# Altium PCB dsPIC Click v1.4.PcbDoc
Units mm, origin at the board's own origin, x right, y up, seen from the top; angles counter-clockwise.
Board outline 38 x 63.5 mm, 2 copper layers (Top Layer, Bottom Layer); 74 components, 48 nets, 199 pads, 45 vias.
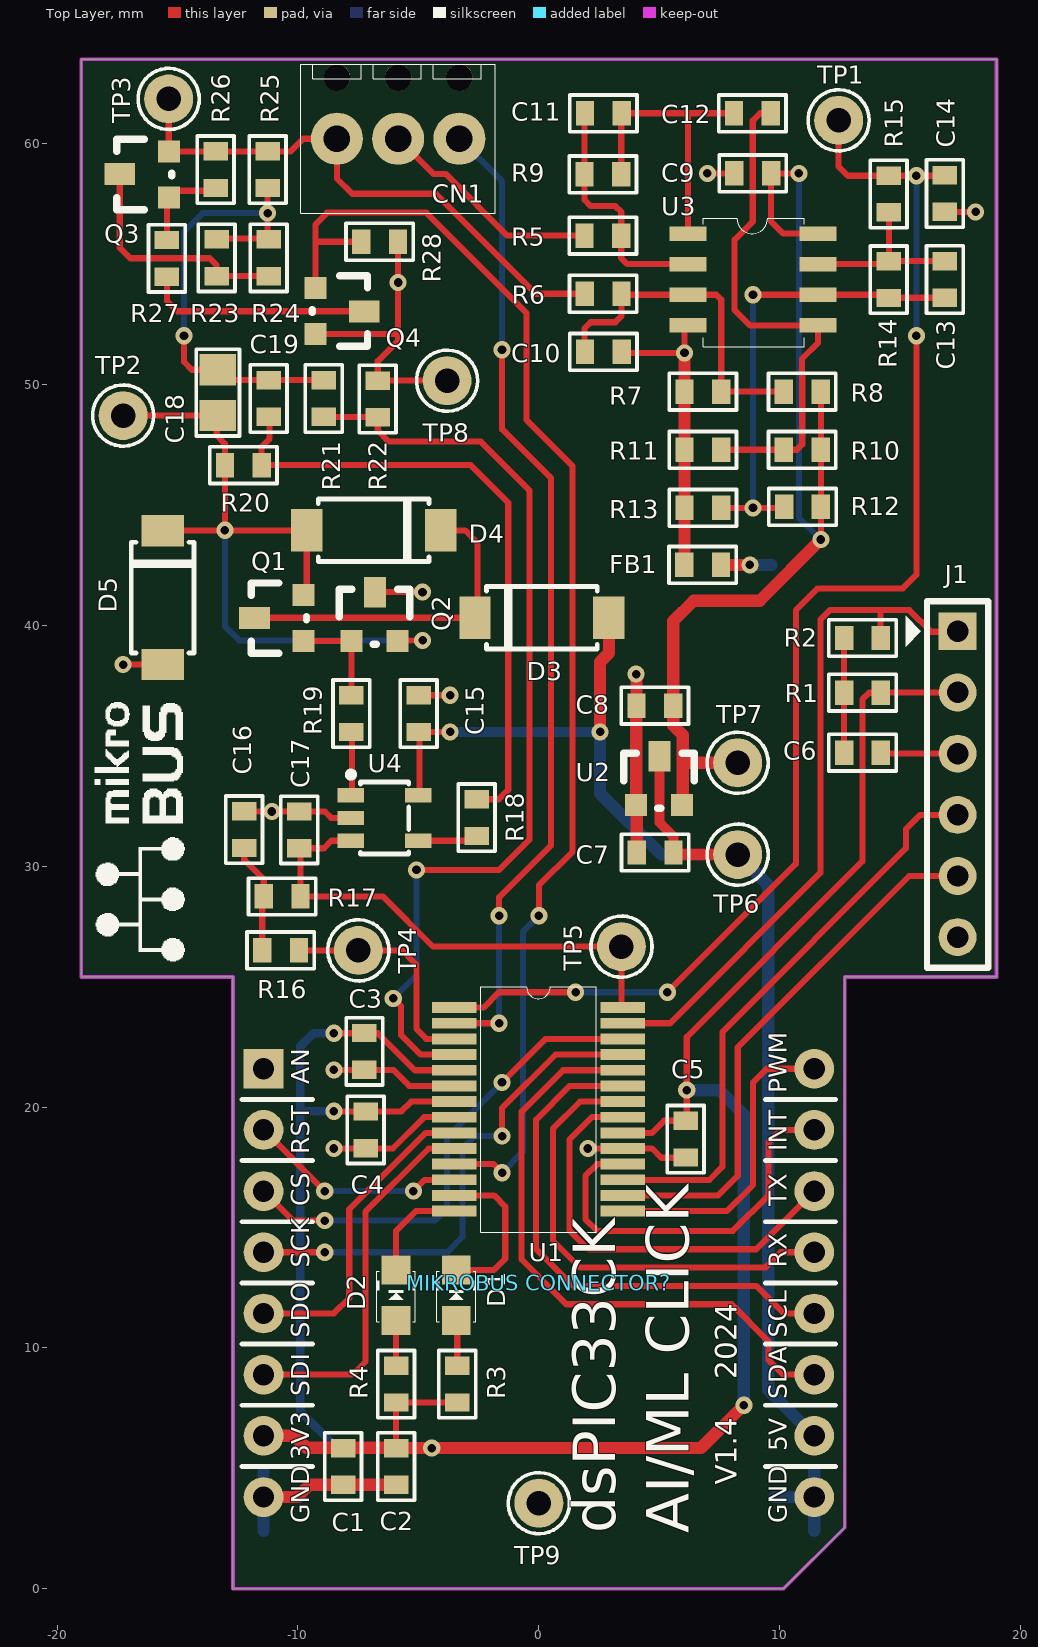
[diagram p0: Top Layer view]
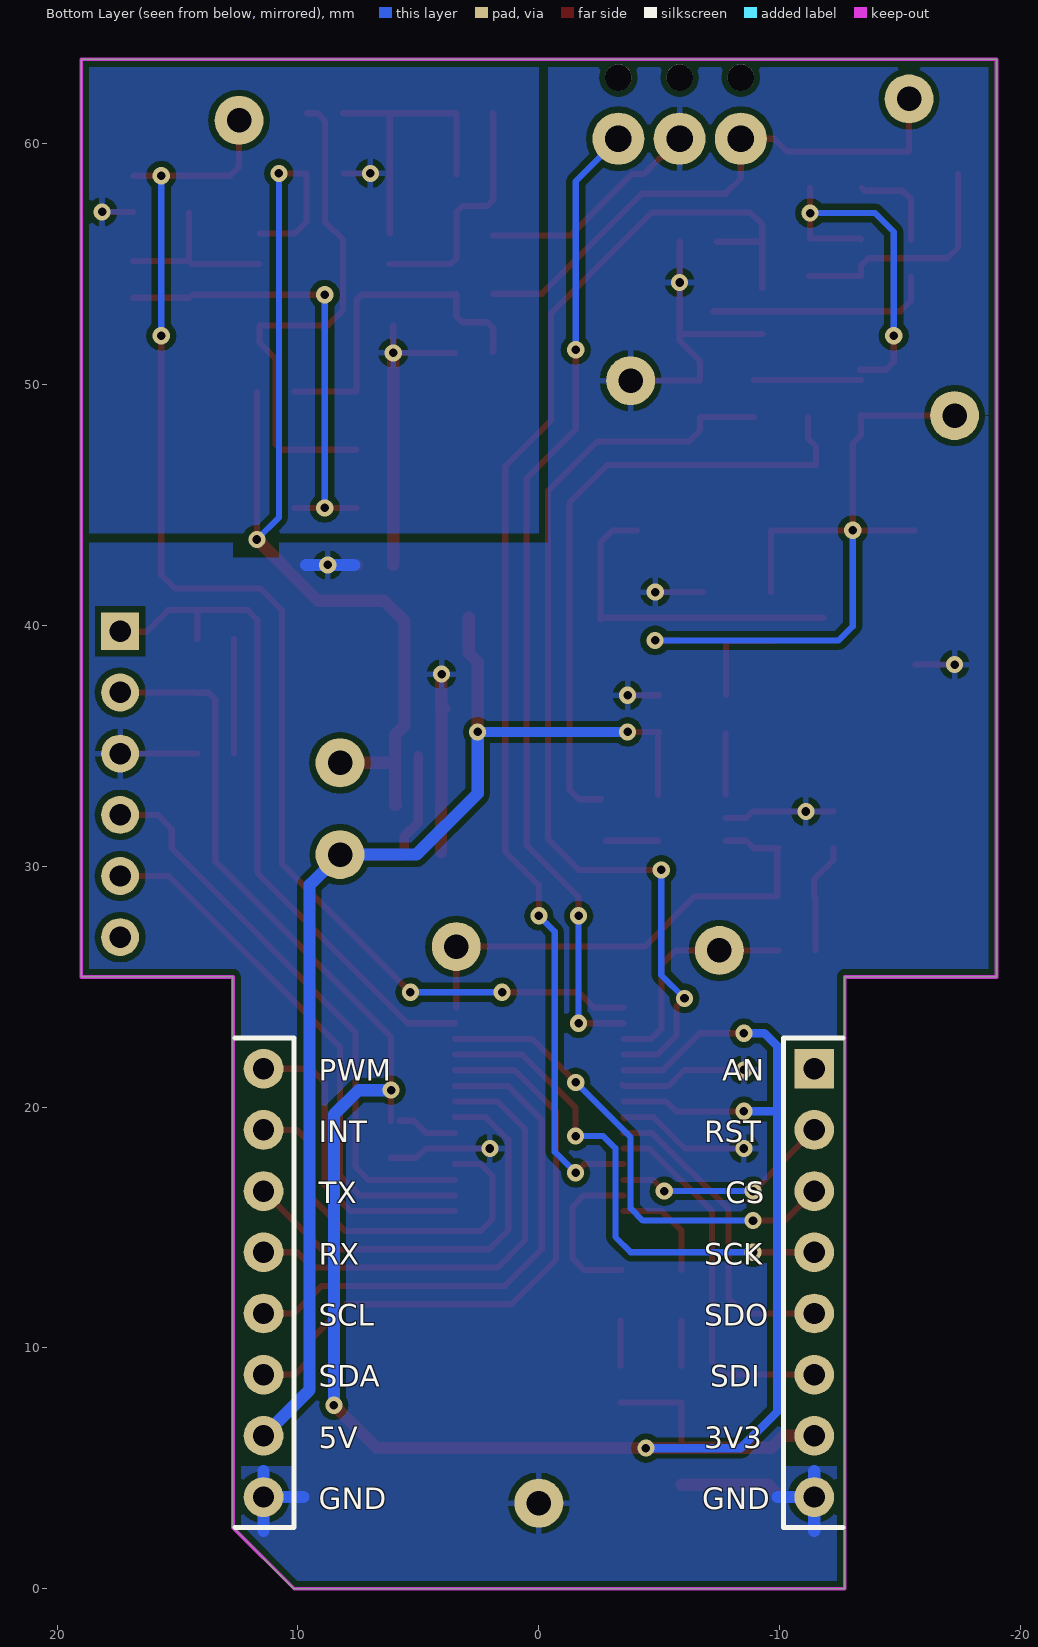
[diagram p1: Bottom Layer view, seen from below]

## Layer stack, top to bottom
Top Solder: solder mask 0.0102, Solder Resist, Dk 3.5
Top Layer: signal copper 0.0356
Dielectric 1: dielectric 0.32, FR-4, Dk 4.8
Bottom Layer: signal copper 0.0356
Bottom Solder: solder mask 0.0102, Solder Resist, Dk 3.5

## Board outline
-19,25.4 -19,63.5 19,63.5 19,25.4 12.7,25.4 12.7,2.54 10.16,0 -12.7,0 -12.7,25.4

## Design rules (kind name [scope] priority, off if disabled: settings)
Clearance [All] p1: gap=0.254
PolygonConnect [All] p1: connectstyle=Relief reliefconductorwidth=0.254 reliefentries=4 polygonreliefangle="90 Angle" airgapwidth=0.254
RoutingVias [All] p1: holewidth=0.711 width=1.27 viastyle="Through Hole" minholewidth=0.711 minwidth=1.27 maxholewidth=0.711 maxwidth=1.27
SolderMaskExpansion [All] p1: expansion=0.102
Width [All] p1: maxlimit=2.54 minlimit=0.203 preferedwidth=0.254 minimp=50.000000 maximp=50.000000 favimp=50.000000
30 further rules are at their usual default settings.

## Classes and differential pairs
component class "dsPIC Click Analog v1.4": C1 C2 C3 C4 C5 C6 C7 C8 C9 C10 C11 C12 C13 C14 C15 C16 C17 C18 C19 CN1 D1 D2 D3 D4 D5 FB1 J1 "MIKROBUS CONNECTOR?" Q1 Q2 Q3 Q4 R1 R2 R3 R4 R5 R6 R7 R8 R9 R10 R11 R12 R13 R14 R15 R16 R17 R18 R19 R20 R21 R22 R23 R24 R25 R26 R27 R28 U1

## Components (designator, comment, footprint, x,y, rotation, side; value= is the part's Value field where it differs from the comment)
C1 "1uF" 0603C -8.169,5.853 r270 top locked
C2 "0.1uF" 0603C -5.969,5.853 r270 top locked
C3 "0.1uF" 0603C -7.2,21.54 r90 top locked
C4 "0.1uF" 0603C -7.23,19.823 r270 top locked
C5 "0.1uF" 0603C 6.137,17.896 r90 top locked
C6 "0.1uF" 0603C 12.66,34.671 r0 top locked
C7 "0.1uF" 0603C 5.599,30.607 r180 top
C8 "1uF" 0603C 5.588,36.703 r180 top
C9 "0.1uF" 0603C 9.652,58.801 r180 top
C10 "0.1uF" 0603C 1.905,51.308 r0 top
C11 "47pF" 0603C 1.905,61.214 r0 top
C12 "0.1uF" 0603C 8.09,61.214 r0 top
C13 "1000pF" 0603C 16.891,53.583 r90 top
C14 "680pF" 0603C 16.891,57.15 r90 top
C15 "1uF" 0603C -4.95,35.56 r90 top
C16 "0.015uF" 0603C -12.192,30.745 r90 top
C17 "1500pF" 0603C -9.906,30.734 r90 top
C18 "22uF" 0805C -13.33,49.657 r90 top
C19 "0.1uF" 0603C -11.176,48.641 r90 top
CN1 "1725669" 1725669 -8.382,60.198 r0 top locked
D1 "LED Red" LTST-C171 -3.429,12.192 r90 top
D2 "LED Green" LTST-C171 -5.928,12.192 r90 top
D3 "SS14" SMA-FL 0.127,40.31 r180 top
D4 "SS14" SMA-FL -6.858,43.942 r0 top
D5 "SS14" SMA-FL -15.621,41.148 r90 top
FB1 "FB" 0603FB 7.57,42.545 r180 top
J1 "ICSP" HDR1X6 17.384,39.751 r270 top locked
"MIKROBUS CONNECTOR?" "MIKROBUS DEVICE CONN." MIKRO_BUS_DSPIC_T 0,0 r0 top locked
Q1 "MMBT3904" SOT-23 -9.779,39.37 r90 top
Q2 "MMBT3906" SOT-23 -7.747,39.345 r0 top
Q3 "PMV48XP" SOT-23 -15.367,57.785 r90 top
Q4 "2N7002" SOT-23 -9.271,53.975 r270 top
R1 "10k" 0603R 12.66,37.16 r0 top locked
R2 "470R" 0603R 12.66,39.431 r0 top locked
R3 "330R" 0603R -3.429,9.271 r270 top
R4 "330R" 0603R -5.969,9.271 r270 top
R5 "10K" 0603R 1.883,56.134 r0 top
R6 "10K" 0603R 1.894,53.721 r0 top
R7 "10K" 0603R 6.035,49.657 r0 top
R8 "200K" 0603R 10.16,49.657 r0 top
R9 "100K" 0603R 3.429,58.76 r180 top
R10 "100K" 0603R 10.16,47.244 r0 top
R11 "100K" 0603R 6.035,47.244 r0 top
R12 "1K" 0603R 10.171,44.872 r0 top
R13 "1K" 0603R 6.035,44.831 r0 top
R14 "4.99K" 0603R 14.478,55.118 r270 top
R15 "10K" 0603R 14.478,58.674 r270 top
R16 "1K" 0603R -9.947,26.543 r180 top
R17 "10K" 0603R -11.43,28.702 r0 top
R18 "10K" 0603R -2.54,31.242 r90 top
R19 "0R" 0603R -7.747,35.56 r90 top
R20 "100K" 0603R -13.042,46.609 r0 top
R21 "100K" 0603R -8.89,48.641 r90 top
R22 "10K" 0603R -6.731,50.165 r270 top
R23 "20R" 0603R -13.335,54.483 r90 top
R24 "20R" 0603R -11.176,54.483 r90 top
R25 "1K" 0603R -11.303,59.69 r270 top
R26 "100K" 0603R -13.462,59.69 r270 top
R27 "100K" 0603R -15.483,56.007 r270 top
R28 "10K" 0603R -7.382,55.88 r0 top
TP1 "Test Point Orange" TP_KEYSTONE_5003 12.446,60.96 r90 top
TP2 "Test Point Orange" TP_KEYSTONE_5003 -17.258,48.707 r90 top
TP3 "Test Point Orange" TP_KEYSTONE_5003 -15.367,61.849 r90 top
TP4 "Test Point Orange" TP_KEYSTONE_5003 -7.493,26.502 r90 top
TP5 "Test Point Orange" TP_KEYSTONE_5003 3.429,26.661 r90 top
TP6 "Test Point Red" TP_KEYSTONE_5000 8.255,30.48 r0 top
TP7 "Test Point Red" TP_KEYSTONE_5000 8.255,34.29 r0 top
TP8 "Test Point Black" TP_KEYSTONE_5001 -3.81,50.154 r90 top
TP9 "Test Point Black" TP_KEYSTONE_5001 0,3.556 r90 top
U1 "dsPIC33CK256MC502" SSOP-28 -0.017,19.904 r270 top locked
U2 "MCP1754ST-3.3v" SOT-23 4.064,32.535 r0 top
U3 "MCP6002" SOIC-8 6.19,56.261 r0 top locked
U4 "MCP6001" TSOP-5 -6.4,32 r270 top locked
? "MikroBusLogo" MB_Large -16.51,26.543 r90 top locked

## Footprints (in the part's own frame and the unit in brackets; to place one, negate y for a bottom-side part, rotate by r counter-clockwise, add the part's x,y. Pads: shape width x height; smd on the part's side, far side on the other; paste and mask are expansions set on the pad)
0603C [mil] "Capacitor"
  rect 30x40 smd: 1(0.42,1.6) 2(60.42,1.6)
  silkscreen extent -25,-28 85,32, body extent -2,-15 61,17, height 31
0603FB [mil] "Ferrite Bead"
  rect 30x40 smd: 1(0.42,1.6) 2(60.42,1.6)
  silkscreen extent -25,-28 85,32, body extent -2,-16 61,16, height 31
0603R [mil] "Resistor"
  rect 30x40 smd: 1(0.42,1.6) 2(60.42,1.6)
  silkscreen extent -25,-28 85,32, body extent -2,-16 61,16, height 18
0805C [mm] "Capacitor"
  rect 1.3x1.5 smd: 1(-0.95,0) 2(0.95,0)
  silkscreen extent -1.8,-0.9 1.8,0.9, body extent -1,-0.62 1,0.63, height 1.25
1725669 [mm] "Connector; Terminal; 3 Position, 2.45mm"
  round 2.159 hole 1.1: 1(0,0) 2(2.54,0) 3(5.08,0)
  round 1.1 hole 1.1 unplated mask+0.051: ""(0,2.54) ""(2.54,2.54) ""(5.08,2.54)
  silkscreen extent -1.5,-3.1 6.58,3.1, body extent -1.52,-3.13 6.62,3.08, height 8.5
HDR1X6 [mil]
  rect 62x62 hole 35: 1(0,0)
  round 62 hole 35: 2(100,0) 3(200,0) 4(300,0) 5(400,0) 6(500,0)
  silkscreen extent -49,-85 550,50, body extent -50,-50 550,50, height 336
LTST-C171 [mm] "led, 0805"
  rect 1.2x1.2 smd: 1(-1.05,0) 2(1.05,0)
  silkscreen extent -1.1,-0.8 1,0.8, body extent -1,-0.63 1,0.62, height 1.1
MB_Large [mm]
  silkscreen extent -0.5,-1.81 10.26,1.93
MIKRO_BUS_DSPIC_T [mil] "Mikro Bus Click - T-Shaped"
  rect 65x65 hole 35: 1(-450,850)
  round 65 hole 35: 2(-450,750) 3(-450,650) 4(-450,550) 5(-450,450) 6(-450,350) 7(-450,250) 8(-450,150) 9(450,150) 10(450,250) 11(450,350) 12(450,450) 13(450,550) 14(450,650) 15(450,750) 16(450,850)
  silkscreen extent -485,200 485,800, body extent -500,100 500,900, height 98
SMA-FL [mm]
  rect 1.3x1.76 smd: 1(-2.78,0) 2(2.78,0)
  silkscreen extent -2.3,-1.3 2.3,1.3, body extent -2.5,-1.35 2.5,1.35, height 2.22
SOIC-8 [mm]
  rect 1.55x0.6 smd: 1(0,0) 2(0,-1.27) 3(0,-2.54) 4(0,-3.81) 5(5.4,-3.81) 6(5.4,-2.54) 7(5.4,-1.27) 8(5.4,0)
  silkscreen extent 0.64,-4.7 4.83,0.64, body extent -0.5,-4.45 5.5,0.45, height 1.75
SOT-23 [mil]
  rect 36x36 smd: 1(-1,-0.17) 2(74,-0.17)
  rect 36x50 smd: 3(37,79.83)
  silkscreen extent -21,-5 94,85, body extent -23,-7 95,92, height 47
SSOP-28 [mm]
  rect 0.45x1.85 smd mask+0.08: 1(-4.225,-3.5) 2(-3.575,-3.5) 3(-2.925,-3.5) 4(-2.275,-3.5) 5(-1.625,-3.5) 6(-0.975,-3.5) 7(-0.325,-3.5) 8(0.325,-3.5) 9(0.975,-3.5) 10(1.625,-3.5) 11(2.275,-3.5) 12(2.925,-3.5) 13(3.575,-3.5) 14(4.225,-3.5) 15(4.225,3.5) 16(3.575,3.5) 17(2.925,3.5) 18(2.275,3.5) 19(1.625,3.5) 20(0.975,3.5) 21(0.325,3.5) 22(-0.325,3.5) 23(-0.975,3.5) 24(-1.625,3.5) 25(-2.275,3.5) 26(-2.925,3.5) 27(-3.575,3.5) 28(-4.225,3.5)
  silkscreen extent -5.1,-2.4 5.1,2.4, body extent -5.1,-3.9 5.1,3.9, height 2.1
TP_KEYSTONE_5000 [mil] "Red"
  round 80 hole 40: 1(0,0)
  silkscreen extent -50,-50 50,50, body extent -50,-50 50,50, height 180
TP_KEYSTONE_5001 [mil] "Black"
  round 80 hole 40: 1(0,0)
  silkscreen extent -50,-50 50,50, body extent -50,-50 50,50, height 180
TP_KEYSTONE_5003 [mil]
  round 80 hole 40: 1(0,0)
  silkscreen extent -50,-50 50,50, body extent -50,-50 50,50, height 180
TSOP-5 [mm] "Small Outline; 6 Leads (1 Absent); Body Width 4.4 mm; Pitch 1.27 mm"
  rect 0.6x1.1 smd: 1(-0.95,-1.4) 2(0,-1.4) 3(0.95,-1.4) 4(0.95,1.4) 5(-0.95,1.4)
  silkscreen extent -1.92,-1.52 1.5,1, body extent -1.45,-1.4 1.45,1.4, height 0.95

## Part data
C1 C2 C3 C4 C5 C6: "Capacitor"
C7 C8 C9 C10 C11 C12 C13 C14 C15 C16 C17 C18 C19: library part CAP, "Capacitor"
CN1: "Terminal Block, 3-Position"
D1: "Red LED"
D2: "Green LED"
D3 D4 D5: "Diode, Schottky"
FB1: "Ferrite Bead"
J1: library part "Header 6", "Header, 6-Pin"
"MIKROBUS CONNECTOR?": "mikroBUS Target Header"
Q1: "Transistor, NPN"
Q2: "Transistor, PNP"
Q3: "MOSFET, P-Channel"
Q4: "MOSFET"
R1 R2 R3 R4 R5 R6 R7 R8 R9 R10 R11 R12 R13 R14 R15 R16 R17 R18 R19 R20 R21 R22 R23 R24 R25 R26 R27 R28: library part Res1, "Resistor"
TP1 TP2 TP3 TP4 TP5: "Test Point, 5003"
TP6 TP7: "Test Point, 5000"
TP8 TP9: "Test Point, 5001"
U1: "16-bit MCU"
U2: "LDO"
U3: "OPAMP, Dual"
U4: "OPAMP, Single"
?: "Logo"

## Via types
v1: diameter 0.711, hole 0.356, Top Layer to Bottom Layer, 45 vias

## Nets (pads, with @x,y where several pads share a name; then routed paths per layer and width w, separated by ;. In a path a pad name is that pad's centre, name@x,y a point inside that pad or via, vN(x,y) a via of type N, cw(c..) or ccw(c..) an arc to the next point about the centre after c; other vN are vias at no path point)
+3.3: "MIKROBUS CONNECTOR?.7" C1.1 C2.1 C3.2 C4.1 C5.2 J1.2 R1.2 R3.2 R4.2 U1.5 U1.7 U1.20 | length 102.4
  Top Layer w0.254: v1(-8.509,19.823) -7.23,19.823 -5.704,19.823 -5.298,20.229 U1.7 ; v1(-8.509,23.064) -7.28,23.064 -6.681,23.064 -5.146,21.529 U1.5 ; C1.1@-8.169,5.853 C1.1@-8.083,5.938 ; C2.1 R4.2 R3.2 ; U1.20 4.7,18.929 5.202,19.431 C5.2@5.784,19.431 ; C5.2@6.137,19.42 v1(6.137,20.701) 6.137,22.901 13.433,30.197 13.433,36.928 13.706,37.201 R1.2 ; R1.2@14.205,37.211 J1.2
  Top Layer w0.508: -11.43,6.35 -10.149,6.35 -9.652,5.853 -8.169,5.853 -5.939,5.853 C2.1 v1(-4.445,5.842) 6.731,5.842 v1(8.509,7.62)
  Bottom Layer w0.356: -9.895,19.823 v1(-8.509,19.823) ; v1(-8.509,23.064) -9.362,23.064 -9.906,22.52 -9.906,7.366 -8.382,5.842 v1(-4.445,5.842)
  Bottom Layer w0.508: v1(6.137,20.701) 7.493,20.701 8.509,19.685 v1(8.509,7.62)
+3.3A: C8.1 C9.1 R8.2 R10.2 R12.2 TP7.1 U2.2 U3.8 | length 44.7
  Top Layer w0.254: v1(10.795,58.76) C9.1 9.641,56.761 10.141,56.261 U3.8 ; v1(11.706,43.561) R12.2 R8.2@11.706,49.687
  Top Layer w0.508: U2.2@5.944,32.535 5.969,32.535 5.969,34.29 ; TP7.1 5.969,34.29 ; v1(11.706,43.561) 9.166,41.021 6.427,41.021 5.577,40.171 C8.1 5.577,35.836 5.969,35.444 5.969,34.29
  Bottom Layer w0.254: v1(10.795,58.76) 10.795,44.472 v1(11.706,43.561)
+5: "MIKROBUS CONNECTOR?.10" C7.1 C15.1 D3.1 TP6.1 U2.3 U4.5 | length 56.6
  Top Layer w0.254: U4.5@-4.95,32.954 -4.95,35.53 C15.1 v1(-3.683,35.571)
  Top Layer w0.406: U2.3@5.004,34.567 5.004,31.815 5.588,31.231 C7.1
  Top Layer w0.508: v1(2.54,35.571) 2.54,38.477 2.907,38.844 D3.1 ; C7.1@5.674,30.48 TP6.1
  Bottom Layer w0.406: v1(-3.683,35.571) v1(2.54,35.571)
  Bottom Layer w0.508: v1(2.54,35.571) 2.54,33.02 5.08,30.48 TP6.1 9.512,29.223 9.512,29.21 9.525,29.197 9.525,8.255 11.43,6.35
AGND: C9.2 C10.2 C14.1 FB1.2 R7.1 R11.1 R13.1 U3.4 | length 14.9
  Top Layer w0.254: C10.2@3.48,51.308 v1(6.046,51.308) U3.4@6.046,52.451 ; v1(6.996,58.76) C9.2 ; C14.1 v1(18.129,57.161)
  Top Layer w0.508: FB1.2@6.046,42.515 R13.1 R11.1 R7.1 v1(6.046,51.308)
BAT_DETECT: R21.1 R22.2 U1.4 | length 39.8
  Top Layer w0.254: R21.1 -6.712,48.652 R22.2 -6.69,48.092 -6.223,47.625 -2.413,47.625 -0.381,45.593 -0.381,31.115 -1.651,29.845 v1(-5.08,29.845) ; v1(-6.046,24.511) -5.72,24.185 -5.72,22.987 -4.912,22.179 U1.4
  Bottom Layer w0.254: v1(-6.046,24.511) -5.08,25.477 v1(-5.08,29.845)
BAT_SNS_ADC: C14.2 R15.1 TP1.1 U1.1 | length 55.8
  Top Layer w0.254: U1.1 -2.292,24.129 -1.656,24.765 v1(1.524,24.765) ; v1(5.334,24.765) 10.668,30.099 10.668,40.629 11.568,41.529 15.113,41.529 15.674,42.09 v1(15.674,52.017) ; TP1.1 12.446,59.044 12.827,58.663 R15.1 v1(15.674,58.663) C14.2@16.829,58.663
  Bottom Layer w0.254: v1(1.524,24.765) v1(5.334,24.765) ; v1(15.674,52.017) v1(15.674,58.663)
BAT_TH: CN1.3 U1.2 | length 41.1
  Top Layer w0.254: U1.2 v1(-1.651,23.479) ; v1(-1.651,27.94) -1.651,28.707 0.508,30.866 0.508,46.101 -1.529,48.138 v1(-1.529,51.435)
  Bottom Layer w0.254: CN1.3 -1.529,58.425 v1(-1.529,51.435) ; v1(-1.651,23.479) v1(-1.651,27.94)
DAC_SINE: R16.1 TP4.1 U1.3 | length 9.5
  Top Layer w0.254: R16.1 -5.674,26.502 -5.085,25.913 -5.085,23.241 -4.673,22.829 U1.3
IRQ: "MIKROBUS CONNECTOR?.15" U1.18 | length 16.3
  Top Layer w0.254: U1.18 2.417,17.629 1.933,17.145 1.933,15.339 2.413,14.859 8.055,14.859 9.536,16.34 9.536,18.542 10.044,19.05 11.43,19.05
LED_GRN: D2.2 U1.14 | length 4.4
  Top Layer w0.254: D2.2 -5.928,14.859 -5.108,15.679 U1.14
LED_RED: D1.2 U1.13 | length 6.7
  Top Layer w0.254: U1.13 -1.856,16.329 -1.397,15.87 -1.397,13.703 -1.858,13.242 D1.2
MCLR: J1.1 R2.2 U1.27 | length 28.7
  Top Layer w0.254: U1.27 5.445,23.479 11.684,29.718 11.684,40.231 12.084,40.631 14.184,40.631 ; R2.2@14.184,39.431 14.184,40.631 ; J1.1 17.364,39.731 16.284,39.731 15.384,40.631 14.184,40.631
NetC6_1: C6.1 R1.1 R2.1 | length 4.8
  Top Layer w0.254: C6.1@12.66,34.671 12.66,37.006 R2.1@12.66,39.431
NetC10_1: C10.1 R6.2 R7.2 R8.1 U3.3 | length 14.3
  Top Layer w0.254: C10.1 1.894,51.37 1.894,52.324 2.148,52.578 3.175,52.578 3.429,52.832 R6.2 ; R6.2@3.47,53.721 U3.3 7.366,53.721 7.57,53.517 R7.2 R8.1
NetC11_1: C11.1 R5.2 R9.2 U3.2 | length 10.1
  Top Layer w0.254: C11.1 1.894,61.233 R9.2 1.894,57.658 2.148,57.404 3.175,57.404 3.418,57.161 R5.2 3.418,55.245 3.672,54.991 U3.2
NetC11_2: C11.2 C12.1 R9.1 U3.1 | length 12.2
  Top Layer w0.254: R9.1 3.418,61.233 C11.2 C12.1@8.128,61.255 ; U3.1 6.19,61.255
NetC12_2: C12.2 R10.1 R11.2 U3.5 | length 21.5
  Top Layer w0.254: R11.2 R10.1 10.709,47.285 10.933,47.509 10.933,50.363 10.922,50.374 10.922,51.054 11.59,51.722 U3.5 8.763,52.451 8.128,53.086 8.128,56.007 8.879,56.758 8.879,60.949 9.185,61.255 C12.2 C12.2@9.637,61.255
NetC13_1: C13.1 R12.1 R13.2 R14.2 U3.6 | length 19.2
  Top Layer w0.254: R13.2 v1(8.89,44.872) R12.1@10.141,44.872 ; v1(8.89,53.721) U3.6 R14.2@14.381,53.721 ; R14.2@14.529,53.594 C13.1
  Bottom Layer w0.254: v1(8.89,44.872) v1(8.89,53.721)
NetC13_2: C13.2 R14.1 R15.2 U3.7 | length 7.2
  Top Layer w0.254: U3.7 R14.1@14.402,54.991 ; R15.2 14.529,57.128 14.529,55.118 C13.2
NetC16_1: C16.1 R16.2 R17.1 | length 4.6
  Top Layer w0.254: C16.1 -12.233,30.267 -11.419,29.453 R17.1 -11.481,28.68 R16.2
NetC18_1: C18.1 D4.1 D5.2 Q1.2 Q2.2 R20.1 TP2.1 | length 30.8
  Top Layer w0.254: TP2.1 C18.1 ; D5.2 -15.607,43.942 v1(-13.031,43.942) ; C18.1@-13.37,48.652 -13.37,47.879 -13.031,47.54 R20.1 v1(-13.031,43.942) ; Q1.2@-9.638,41.391 D4.1 v1(-13.031,43.942) ; Q2.2@-5.842,39.37 v1(-4.826,39.37)
  Bottom Layer w0.254: v1(-13.031,43.942) -13.031,39.955 -12.446,39.37 v1(-4.826,39.37)
NetC18_2: C18.2 C19.2 R21.2 R23.2 R24.2 R25.2 | length 19.4
  Top Layer w0.254: v1(-14.732,52.017) -14.732,50.932 -14.407,50.607 C18.2 ; R23.2 -13.33,56.064 -11.262,56.064 v1(-11.262,57.109) R25.2 ; C18.2@-13.37,50.176 R21.2
  Bottom Layer w0.254: v1(-14.732,52.017) -14.732,56.333 -13.956,57.109 v1(-11.262,57.109)
NetC19_1: C19.1 R18.2 R20.2 | length 26.4
  Top Layer w0.254: C19.1@-11.176,48.641 -11.176,47.752 -11.507,47.421 R20.2 -2.835,46.65 -1.27,45.085 -1.27,33.163 -1.656,32.777 R18.2
NetD1_1: D1.1 R3.1 | length 1.9
  Top Layer w0.254: R3.1 D1.1@-3.388,11.142
NetD2_1: D2.1 R4.1 | length 1.9
  Top Layer w0.254: R4.1 D2.1
NetD3_2: D3.2 D4.2 Q1.3 | length 14.2
  Top Layer w0.254: Q1.3@-11.811,40.31 D3.2@-2.555,40.31 ; D4.2 -3.062,43.942 -2.555,43.435 D3.2@-2.555,40.31 ; D3.2@-2.555,40.245 D3.2@-2.555,40.31
NetQ1_1: Q1.1 Q2.1 R19.2 | length 4.2
  Top Layer w0.254: Q1.1@-9.779,39.345 -7.772,39.345 R19.2@-7.772,37.11
NetQ3_1: Q3.1 R26.2 R27.1 | length 3.9
  Top Layer w0.254: R27.1 -15.443,57.684 -15.367,57.76 -15.088,58.039 -13.538,58.039 R26.2
NetQ3_3: Q3.3 R23.1 R24.1 | length 10
  Top Layer w0.254: Q3.3@-17.399,58.725 -17.399,55.675 -16.958,55.234 -13.665,55.234 -13.376,54.945 R23.1 R24.1
NetQ4_3: Q4.3 R27.2 | length 9.4
  Top Layer w0.254: R27.2 -15.443,53.467 -15.011,53.035 Q4.3@-7.239,53.035
NetR18_1: R18.1 U4.4 | length 2.2
  Top Layer w0.254: U4.4@-4.95,31.054 R18.1@-2.779,31.054
NetR19_1: R19.1 U4.1 | length 2.6
  Top Layer w0.254: U4.1@-7.75,32.954 R19.1@-7.75,35.533
PGC: J1.5 U1.16 | length 22.5
  Top Layer w0.254: U1.16 7.439,16.329 8.255,17.145 8.255,22.479 15.367,29.591 J1.5
PGD: J1.4 U1.17 | length 23.9
  Top Layer w0.254: U1.17 7.084,16.979 7.62,17.515 7.62,23.114 15.24,30.734 15.24,31.54 15.831,32.131 J1.4
PWM: "MIKROBUS CONNECTOR?.16" U1.15 | length 12.9
  Top Layer w0.254: U1.15 7.805,15.679 8.89,16.764 8.89,21.021 9.459,21.59 11.43,21.59
RST: "MIKROBUS CONNECTOR?.2" U1.12 | length 9.2
  Top Layer w0.254: -11.43,19.05 v1(-8.89,16.51) ; v1(-5.207,16.51) -4.738,16.979 U1.12
  Bottom Layer w0.254: v1(-8.89,16.51) v1(-5.207,16.51)
RXD: "MIKROBUS CONNECTOR?.13" U1.22 | length 19.6
  Top Layer w0.254: U1.22 1.708,20.229 0.583,19.104 0.583,14.46 1.708,13.335 9.398,13.335 10.033,13.97 11.43,13.97
SCL: "MIKROBUS CONNECTOR?.12" U1.23 | length 22.2
  Top Layer w0.254: U1.23 1.283,20.879 -0.117,19.479 -0.117,14.1 1.41,12.573 9.017,12.573 10.16,11.43 11.43,11.43
SDA: "MIKROBUS CONNECTOR?.11" U1.24 | length 25.6
  Top Layer w0.254: U1.24 1.008,21.529 -0.717,19.804 -0.717,13.671 1.143,11.811 8.001,11.811 9.525,10.287 9.525,9.5 10.135,8.89 11.43,8.89
SINE_ADC: C17.1 R17.2 TP5.1 U1.28 U4.3 | length 21.1
  Top Layer w0.254: U4.3@-7.75,31.054 -8.611,31.054 -8.92,30.745 C17.1 -9.895,30.693 R17.2 -6.477,28.743 -4.395,26.661 TP5.1 U1.28@3.429,24.129
SNS+: CN1.1 Q3.2 R6.1 R25.1 R26.1 TP3.1 | length 23.3
  Top Layer w0.254: TP3.1 -15.367,59.665 -10.312,59.665 -9.779,60.198 CN1.1 -8.382,58.547 -7.747,57.912 -4.277,57.912 -0.127,53.762 R6.1
SNS-: "MIKROBUS CONNECTOR?.8" "MIKROBUS CONNECTOR?.9" C1.2 C2.2 C3.1 C4.2 C5.1 C6.2 C7.2 C8.2 C15.2 C16.2 C17.2 CN1.2 D5.1 FB1.1 J1.3 Q2.3 Q4.2 R5.1 R22.1 R28.2 TP8.1 TP9.1 U1.6 U1.8 U1.19 U2.1 U4.2 | length 74.3
  Top Layer w0.254: v1(-17.258,38.368) D5.1 ; C16.2 -12.222,32.269 C17.2 -8.884,32.269 -8.62,32.004 U4.2@-7.75,32.004 ; Q4.2@-9.271,52.095 -5.842,52.095 ; v1(-8.509,18.279) -6.061,18.279 -4.761,19.579 U1.8 U1.8@-3.561,19.535 ; v1(-8.509,21.54) -6.046,21.54 -5.385,20.879 U1.6 U1.6@-3.473,20.923 ; Q2.3@-6.807,41.377 v1(-4.831,41.377) ; R28.2 -5.847,51.811 -6.69,50.968 R22.1 TP8.1 ; CN1.2 -4.381,58.737 -3.873,58.737 -1.311,56.175 R5.1 ; C15.2 v1(-3.683,37.095) ; v1(2.032,18.279) U1.19 4.703,18.279 5.086,17.896 C5.1@6.137,17.896 ; C6.2@14.184,34.671 J1.3
  Top Layer w0.508: -11.43,3.81 -10.033,3.81 -9.525,4.318 C2.2 ; C8.2@3.924,36.533 C8.2@4.039,36.648 ; v1@4.053,37.958 C8.2 C8.2@4.039,36.648 ; C7.2 4.064,32.51 4.039,32.535 C8.2@4.039,36.648 ; FB1.1 v1(8.763,42.504)
  Bottom Layer w0.508: -11.43,2.413 -11.43,3.81 ; -11.43,4.882 -11.43,3.81 ; -9.906,3.81 -11.43,3.81 ; 7.657,42.504 v1(8.763,42.504) 9.652,42.504 ; 9.779,3.81 11.43,3.81 ; 11.43,2.413 11.43,3.81 ; 11.43,4.882 11.43,3.81
  other v1: -11.084,32.269 4.039,37.973 -5.842,54.229
SPI_CS: "MIKROBUS CONNECTOR?.3" U1.26 | length 20.3
  Top Layer w0.254: -11.43,16.51 -10.204,15.284 v1(-8.89,15.284) ; v1(-1.529,21.021) 0.279,22.829 U1.26
  Bottom Layer w0.254: v1(-8.89,15.284) -4.318,15.284 -3.81,15.792 -3.81,18.74 v1(-1.529,21.021)
SPI_SCK: "MIKROBUS CONNECTOR?.4" U1.25 | length 21.2
  Top Layer w0.254: -11.43,13.97 v1(-8.89,13.97) ; v1(-1.524,18.796) -1.524,19.964 0.691,22.179 U1.25
  Bottom Layer w0.254: v1(-8.89,13.97) -3.81,13.97 -3.175,14.605 -3.175,18.288 -2.667,18.796 v1(-1.524,18.796)
SPI_SDI: "MIKROBUS CONNECTOR?.6" U1.10 | length 15.5
  Top Layer w0.254: -11.43,8.89 -7.736,8.89 -7.189,9.437 -7.189,15.671 -4.581,18.279 U1.10
SPI_SDO: "MIKROBUS CONNECTOR?.5" U1.9 | length 13.2
  Top Layer w0.254: -11.43,11.43 -8.509,11.43 -7.874,12.065 -7.874,15.748 -4.693,18.929 U1.9
TEST_EN: Q4.1 R28.1 U1.11 | length 55.1
  Top Layer w0.254: Q4.1@-9.271,54 -9.271,56.642 -8.785,57.128 -4.677,57.128 -0.508,52.959 -0.508,48.514 1.397,46.609 1.397,30.607 0,29.21 v1(0,27.94) ; -9.271,55.921 R28.1 ; U1.11 -1.881,17.629 v1(-1.524,17.272)
  Bottom Layer w0.254: v1(-1.524,17.272) -0.66,18.136 -0.66,27.28 v1(0,27.94)
TXD: "MIKROBUS CONNECTOR?.14" U1.21 | length 17.8
  Top Layer w0.254: U1.21 2.199,19.579 1.27,18.65 1.27,14.887 2.06,14.097 9.017,14.097 11.43,16.51
pads on no net: "MIKROBUS CONNECTOR?.1" CN1. J1.6

## Polygon pours and split planes (outlines as drawn)
AGND on Bottom Layer "TopLayer-No Net" (solid, pour order 2): 0,43.815 19.05,43.815 19.05,63.5 0,63.5
SNS- on Bottom Layer "SNS-_L02_P000" (solid, remove dead copper, pour order 0): -19.05,63.5 -0.381,63.5 -0.381,43.434 10.785,43.434 10.785,42.799 12.7,42.799 12.7,43.434 19.05,43.434 19.05,25.4 12.7,25.4 12.7,22.86 10.16,22.86 10.16,5.08 12.446,5.08 12.446,2.667 10.033,0.254 9.525,0.254 -12.446,0.254 -12.446,5.08 -10.033,5.08 -10.033,22.86 -12.7,22.86 -12.7,25.4 -19.05,25.4

## Keep-outs
Keep-Out Layer:
  the board outline again, w0.152

## Silkscreen, mask and mechanical layers (free items; w line width, h text height)
Top Overlay:
  text "V1.4    2024" at 8.509,4.318 h1.52 r90

## Text inside footprints (layer, text, board x,y; h text height)
"MIKROBUS CONNECTOR?": Top Overlay "dsPIC33CK / AI/ML CLICK" at 6.8,2.3 h3.05 r90; Top Overlay "PWM" at 10.287,20.574 h0.76 r90; Top Overlay "CS" at -9.525,15.875 h0.76 r90; Top Overlay "TX" at 10.287,15.875 h0.76 r90; Top Overlay "RX" at 10.287,13.335 h0.76 r90; Top Overlay "SCL" at 10.287,10.414 h0.76 r90; Top Overlay "SDA" at 10.287,7.874 h0.76 r90; Top Overlay "GND" at 10.287,2.718 h0.76 r90; Top Overlay "SDO" at -9.525,10.414 h0.76 r90; Top Overlay "RST" at -9.525,18.034 h0.76 r90; Top Overlay "INT" at 10.287,18.161 h0.76 r90; Top Overlay "SCK" at -9.525,13.335 h0.76 r90; Top Overlay "AN" at -9.525,20.955 h0.76 r90; Top Overlay "SDI" at -9.525,8.001 h0.76 r90; Top Overlay "5V" at 10.287,5.715 h0.76 r90; Top Overlay "3V3" at -9.525,5.334 h0.76 r90; Top Overlay "GND" at -9.525,2.718 h0.76 r90; Bottom Overlay "SCK" at -6.858,13.462 h0.89; Bottom Overlay "AN" at -7.62,21.082 h0.89; Bottom Overlay "TX" at 9.144,16.002 h0.89; Bottom Overlay "RX" at 9.144,13.462 h0.89; Bottom Overlay "5V" at 9.144,5.842 h0.89; Bottom Overlay "GND" at 9.144,3.302 h0.89; Bottom Overlay "PWM" at 9.144,21.082 h0.89; Bottom Overlay "RST" at -6.858,18.542 h0.89; Bottom Overlay "SDA" at 9.144,8.382 h0.89; Bottom Overlay "SDO" at -6.858,10.922 h0.89; Bottom Overlay "3V3" at -6.858,5.842 h0.89; Bottom Overlay "GND" at -6.782,3.302 h0.89; Bottom Overlay "CS" at -7.747,16.002 h0.89; Bottom Overlay "SDI" at -7.112,8.382 h0.89; Bottom Overlay "INT" at 9.144,18.542 h0.89; Bottom Overlay "SCL" at 9.144,10.922 h0.89